# Altium PCB HomeGuard.PcbDoc
Units mm, origin at the board's own origin, x right, y up, seen from the top; angles counter-clockwise.
Board outline 50.25 x 50.25 mm, 2 copper layers (Top Layer, Bottom Layer); 19 components, 10 nets, 72 pads, 0 vias.
Unrouted connection lines stored in the file: 3.
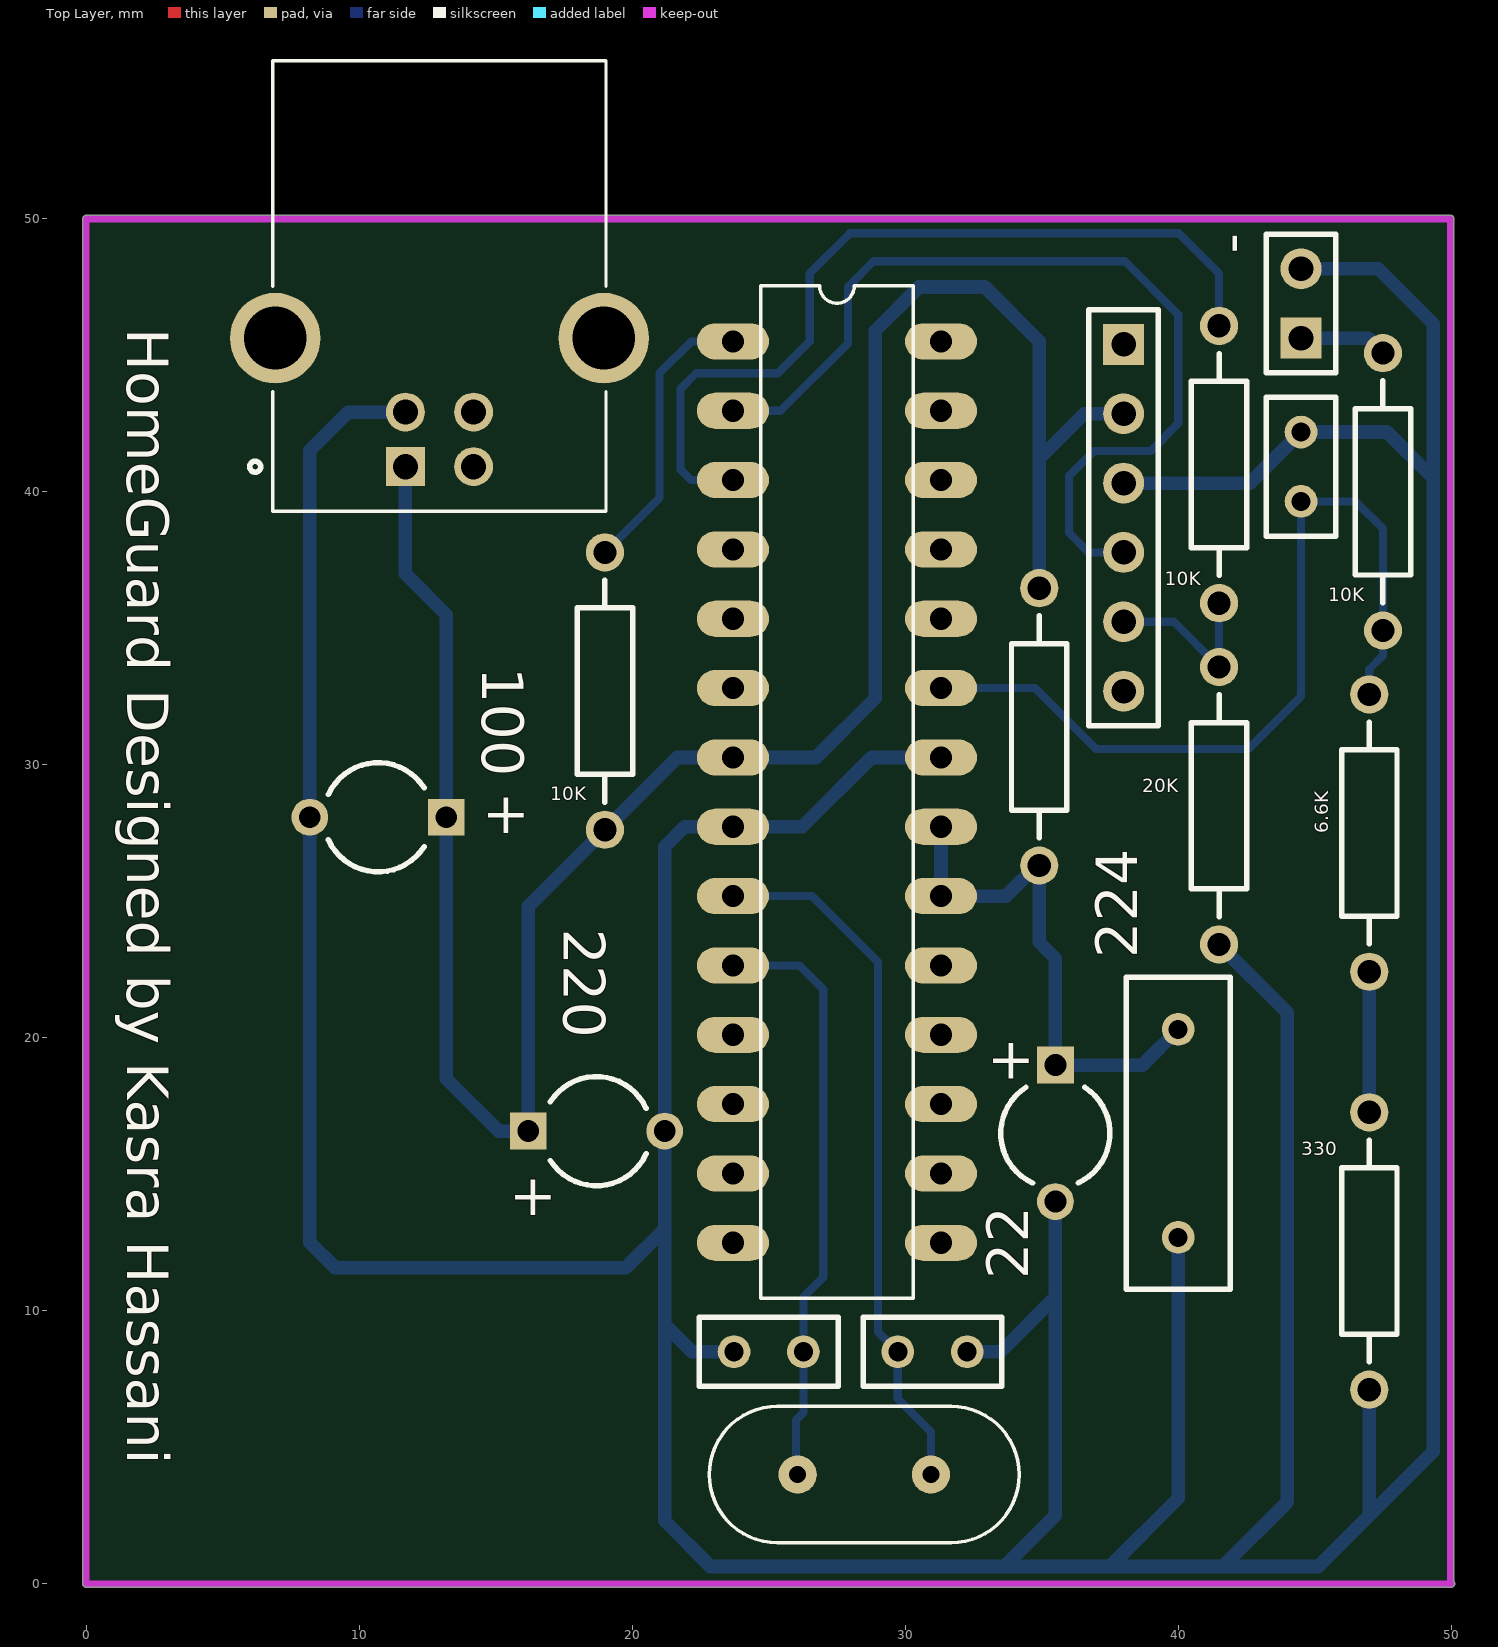
[diagram p0: Top Layer view]
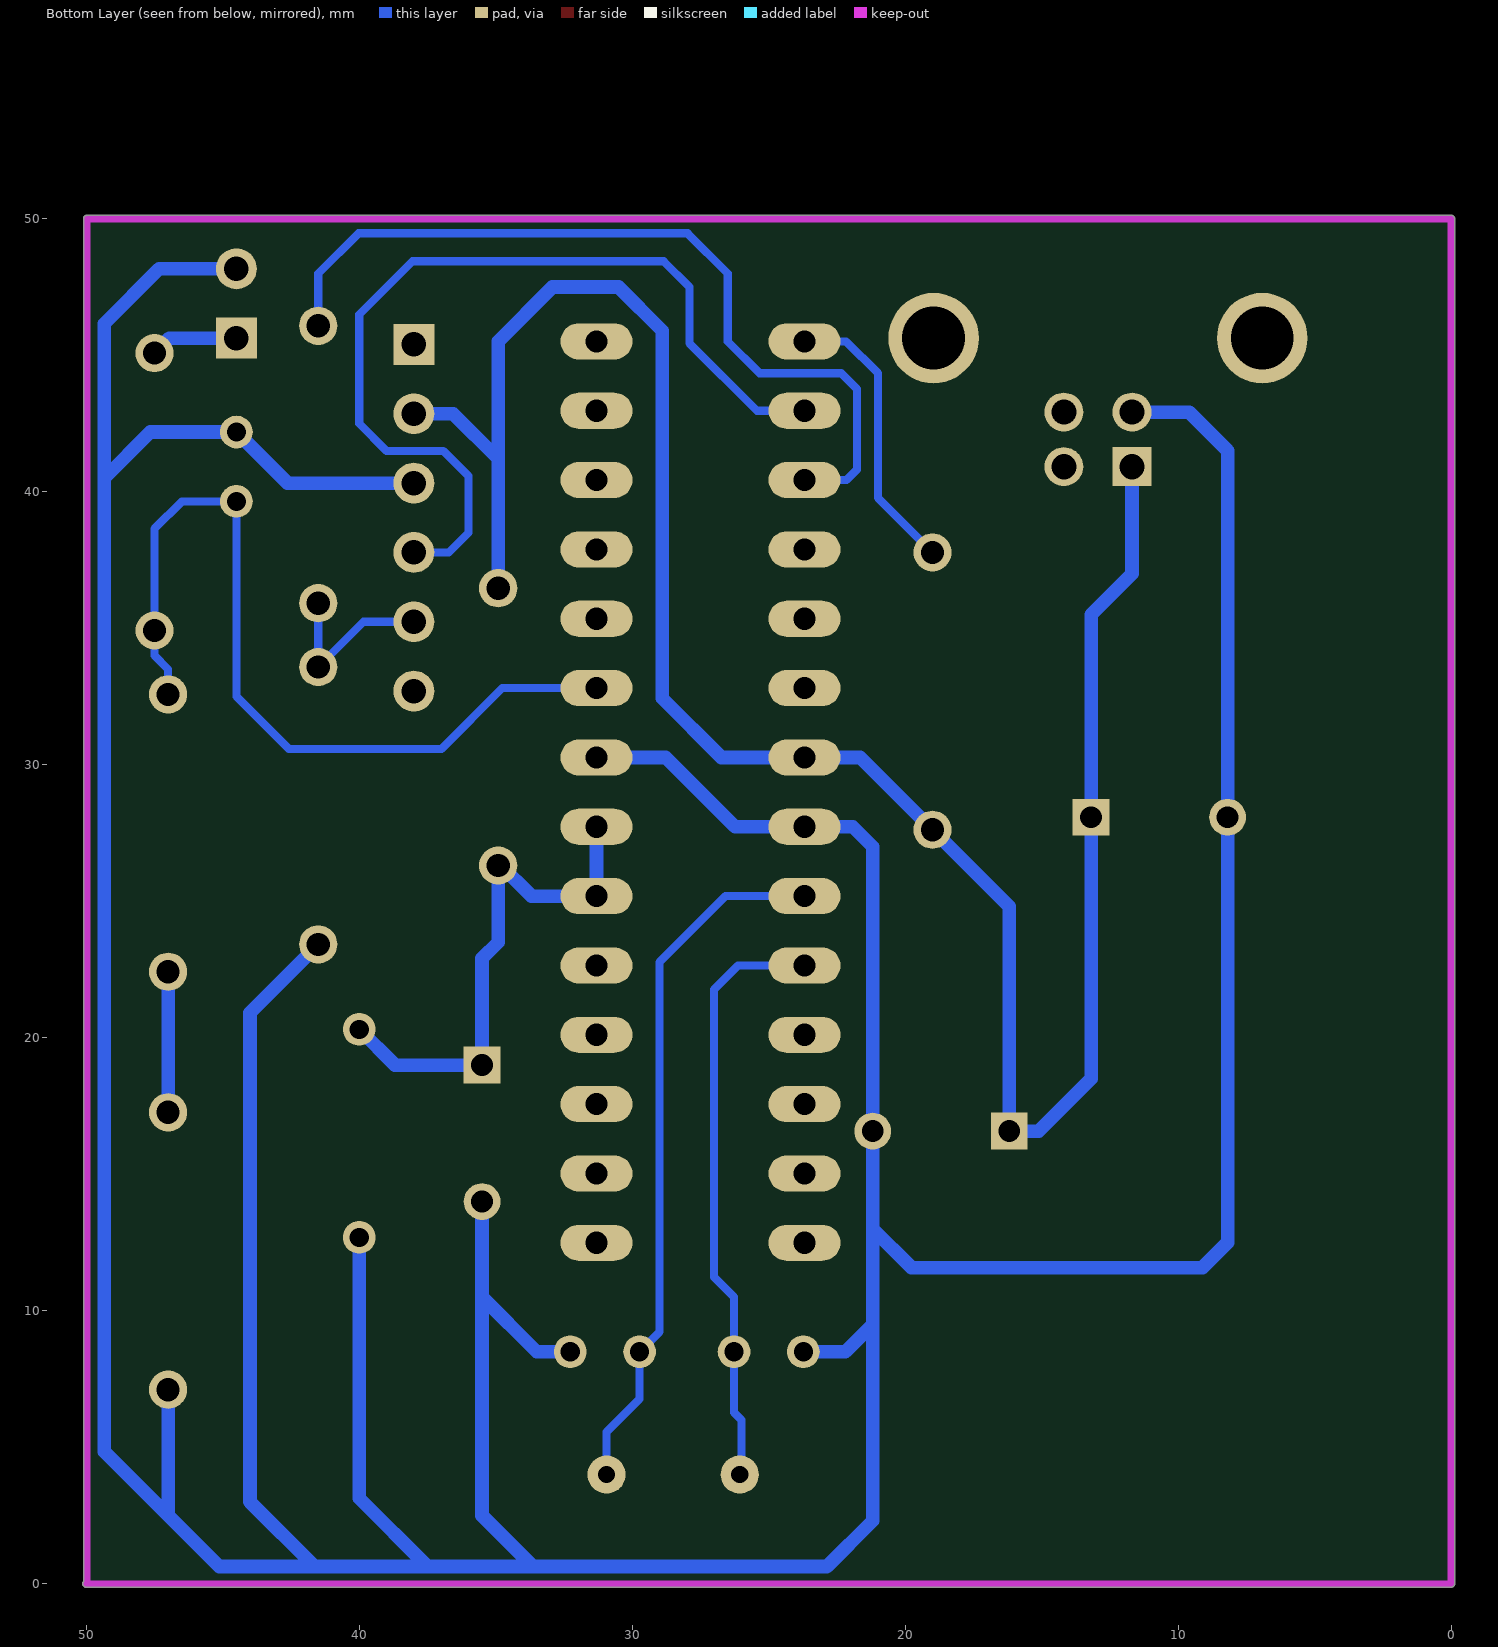
[diagram p1: Bottom Layer view, seen from below]

## Layer stack, top to bottom
Top Solder: solder mask 0.0102, Solder Resist, Dk 3.5
Top Layer: signal copper 0.0356
Dielectric 1: dielectric 0.32, FR-4, Dk 4.8
Bottom Layer: signal copper 0.0356
Bottom Solder: solder mask 0.0102, Solder Resist, Dk 3.5

## Board outline
-0.127,0 ccw(c0,0) 0,-0.127 50,-0.127 ccw(c50,0) 50.127,0 ccw(c50,0) 50.1,0.078 50.1,50 ccw(c49.973,50) 49.973,50.127 0,50.127 ccw(c0,50) -0.127,50

## Design rules (kind name [scope] priority, off if disabled: settings)
Clearance [All] p1: gap=0.254
PolygonConnect [All] p1: connectstyle=Relief reliefconductorwidth=0.254 reliefentries=4 polygonreliefangle="90 Angle" airgapwidth=0.254
RoutingVias [All] p1: holewidth=0.711 width=1.27 viastyle="Through Hole" minholewidth=0.711 minwidth=1.27 maxholewidth=0.711 maxwidth=1.27
SolderMaskExpansion [All] p1: expansion=0.102
Width [All] p1: maxlimit=0.5 minlimit=0.254 preferedwidth=0.3 toplayer_maxwidth=0.254 toplayer_prefwidth=0.254 bottomlayer_minwidth=0.3 minimp=50.000000 maximp=50.000000 favimp=50.000000 checkconnectedcopper=TRUE
30 further rules are at their usual default settings.

## Components (designator, comment, footprint, x,y, rotation, side; value= is the part's Value field where it differs from the comment)
6.6K "Comment" AXIAL-0.4 47,27.5 r90 top
10K "Comment" AXIAL-0.4 41.5,41 r90 top
10K "Comment" AXIAL-0.4 47.5,40 r90 top
10K "Comment" AXIAL-0.4 19,32.7 r90 top
20K "Comment" AXIAL-0.4 41.5,28.5 r90 top
22 "Comment" CAPR5-4X5 35.5,16.5 r270 top
100 "Comment" CAPR5-4X5 10.69,28.08 r180 top
220 "Comment" CAPR5-4X5 18.69,16.58 r0 top
224 "Comment" RAD-0.3 40,16.5 r90 top
330 "Comment" AXIAL-0.4 47,12.19 r90 top
- "Comment" HDR1X2 44.5,45.63 r90 top
? "Comment" AXIAL-0.4 34.91,31.39 r90 top
? "Comment" XTAL_ECS-160-20-4VX 28.5,4 r0 top
? "Comment" DIL28 27.5,29 r0 top
? "Comment" CUI_UJ2-BH-4-TH 11.69,40.92 r180 top
? "Comment" HDR1X6 38,45.4 r270 top
? "Comment" RAD-0.1 25,8.5 r180 top
? "Comment" RAD-0.1 31,8.5 r180 top
? "Comment" RAD-0.1 44.5,40.92 r90 top

## Footprints (in the part's own frame and the unit in brackets; to place one, negate y for a bottom-side part, rotate by r counter-clockwise, add the part's x,y. Pads: shape width x height; smd on the part's side, far side on the other; paste and mask are expansions set on the pad)
AXIAL-0.4 [mm] "Axial Device, Thru-Hole; 2 Leads; 0.4 in Pin Spacing"
  round 1.4 hole 0.85: 1(-5.08,0) 2(5.08,0)
  silkscreen extent -4.06,-1.02 4.06,1.02
CAPR5-4X5 [mm] "Capacitor; 2 Leads"
  rect 1.35x1.35 hole 0.8: 1(-2.5,0)
  round 1.35 hole 0.8: 2(2.5,0)
  silkscreen extent -1.69,-2 1.82,2
CUI_UJ2-BH-4-TH [mm]
  rect 1.428x1.428 hole 0.92: 1(0,0)
  round 1.428 hole 0.92: 2(-2.5,0) 3(-2.5,-2) 4(0,-2)
  round 3.316 hole 2.3: SH1(-7.27,-4.71) SH2(4.77,-4.71)
  silkscreen extent -7.35,-14.87 5.7,1.63
DIL28 [mil]
  oval 104x52 hole 32: 1(-150,650) 2(-150,550) 3(-150,450) 4(-150,350) 5(-150,250) 6(-150,150) 7(-150,50) 8(-150,-50) 9(-150,-150) 10(-150,-250) 11(-150,-350) 12(-150,-450) 13(-150,-550) 14(-150,-650) 15(150,-650) 16(150,-550) 17(150,-450) 18(150,-350) 19(150,-250) 20(150,-150) 21(150,-50) 22(150,50) 23(150,150) 24(150,250) 25(150,350) 26(150,450) 27(150,550) 28(150,650)
  silkscreen extent -110,-730 110,730
HDR1X2 [mm] "Connector; Header; 2 Position"
  rect 1.5x1.5 hole 0.9: 1(0,0)
  round 1.5 hole 0.9: 2(2.54,0)
  silkscreen extent -1.27,-1.27 3.81,1.27
HDR1X6 [mm] "Connector; Header; 6 Position"
  rect 1.5x1.5 hole 0.9: 1(0,0)
  round 1.5 hole 0.9: 2(2.54,0) 3(5.08,0) 4(7.62,0) 5(10.16,0) 6(12.7,0)
  silkscreen extent -1.27,-1.27 13.97,1.27
RAD-0.1 [mm] "Radial Cap, Thru-Hole; 2 Leads; 0.1 in Pin Spacing"
  round 1.2 hole 0.7: 1(-1.27,0) 2(1.27,0)
  silkscreen extent -2.54,-1.27 2.54,1.27
RAD-0.3 [mm] "Radial Cap, Thru-Hole; 2 Leads; 0.3 in Pin Spacing"
  round 1.2 hole 0.7: 1(-3.81,0)
  round 1.2 hole 0.7 paste+0: 2(3.81,0)
  silkscreen extent -5.71,-1.91 5.71,1.91
XTAL_ECS-160-20-4VX [mm]
  round 1.4 hole 0.63: 1(-2.44,0) 2(2.44,0)
  silkscreen extent -5.68,-2.5 5.68,2.5

## Part data
6.6K 10K 10K 10K 20K 330 ?: library part Res2
22 100 220: library part Cap2
224: library part Cap
-: library part "Header 2"
?: library part ECS-160-20-4VX
?: library part ATMEGA328-PU
?: library part UJ2-BH-4-TH
?: library part "Header 6"

## Nets (pads, with @x,y where several pads share a name; then routed paths per layer and width w, separated by ;. In a path a pad name is that pad's centre, name@x,y a point inside that pad or via, vN(x,y) a via of type N, cw(c..) or ccw(c..) an arc to the next point about the centre after c; other vN are vias at no path point)
ADC: 6.6K.2 10K.1@47.5,34.92 ?.1@44.5,39.65 ?.23 | length 31.8
  Bottom Layer w0.3: ?.23 34.76,32.81 36.99,30.58 42.58,30.58 44.5,32.5 44.5,39.65 46.5,39.65 47.5,38.65 47.5,34.92 47.5,34 47,33.5 6.6K.2
GND: 6.6K.1 20K.1 22.2 100.2 220.2 224.1 330.1 330.2 -.2 ?.1@32.27,8.5 ?.2@23.73,8.5 ?.2@44.5,42.19 ?.3@38,40.32 ?.4@11.69,42.92 ?.8 ?.22 | length 242.4
  Bottom Layer w0.5: ?.4@11.69,42.92 9.6,42.92 8.19,41.51 100.2 8.19,12.5 9.11,11.58 19.77,11.58 21.19,13 ; 21.19,9.5 22.19,8.5 ?.2@23.73,8.5 ; ?.22 28.77,30.27 26.23,27.73 ?.8 21.92,27.73 21.19,27 220.2 21.19,2.31 22.869,0.631 37.5,0.631 ; ?.1@32.27,8.5 33.5,8.5 35.5,10.5 ; 33.631,0.631 35.5,2.5 35.5,10.5 ; 22.2 35.5,10.5 ; ?.3@38,40.32 42.63,40.32 44.5,42.19 47.652,42.19 49.342,40.5 ; 224.1 40,3.131 37.5,0.631 ; 20K.1 44,20.92 44,3 41.631,0.631 ; -.2 47.33,48.17 49.342,46.158 49.342,40.5 ; 47,2.5 330.1 ; 330.2 6.6K.1 ; 37.5,0.631 41.631,0.631 ; 41.631,0.631 45.131,0.631 49.342,4.842 49.342,40.5
Reset: 10K.2@19,37.78 ?.1@23.69,45.51 | length 10.6
  Bottom Layer w0.3: 10K.2@19,37.78 21,39.78 21,44.346 22.164,45.51 ?.1@23.69,45.51
RX: 10K.1@41.5,35.92 10K.2@41.5,46.08 20K.2 ?.3@23.69,40.43 ?.5@38,35.24 | length 37.6
  Bottom Layer w0.3: ?.3@23.69,40.43 22.15,40.43 21.77,40.81 21.77,43.77 22.346,44.346 25.336,44.346 26.5,45.51 26.5,48 27.969,49.469 40.031,49.469 41.5,48 10K.2@41.5,46.08 ; ?.5@38,35.24 39.84,35.24 20K.2 10K.1@41.5,35.92
TX: ?.2@23.69,42.97 ?.4@38,37.78 | length 32.9
  Bottom Layer w0.3: ?.2@24.59,42.82 24.74,42.97 25.43,42.97 27.9,45.44 27.9,47.5 28.846,48.446 38.054,48.446 40,46.5 40,42.5 39,41.5 36.92,41.5 36,40.58 36,38.5 36.72,37.78 ?.4@38,37.78
V5: 10K.1@19,27.62 22.1 100.1 220.1 224.2 ?.1@11.69,40.92 ?.1@34.91,26.31 ?.2@34.91,36.47 ?.2@38,42.86 ?.7 ?.20 ?.21 | length 103.9
  Bottom Layer w0.5: ?.1@11.69,40.92 11.69,37 13.19,35.5 100.1 13.19,18.5 15.11,16.58 220.1 16.19,24.81 19,27.62 21.65,30.27 ?.7 26.73,30.27 28.9,32.44 28.9,45.9 30.5,47.5 32.92,47.5 34.91,45.51 34.91,41.21 ; ?.21 ?.20 33.69,25.19 ?.1@34.86,26.36 ; ?.1@34.91,26.31 34.91,23.5 35.5,22.91 22.1 38.69,19 224.2 ; ?.2@34.91,36.47 34.91,41.21 ; ?.2@38,42.86 36.56,42.86 34.91,41.21
V12: 10K.2@47.5,45.08 -.1 | length 3.2
  Bottom Layer w0.5: -.1 46.95,45.63 10K.2@47.5,45.08
VCC: 
XTAL1: ?.2@29.73,8.5 ?.2@30.94,4 ?.9 | length 25.9
  Bottom Layer w0.3: ?.9 26.58,25.19 29,22.77 29,9.23 29.73,8.5 29.73,6.77 30.94,5.56 ?.2@30.94,4
XTAL2: ?.1@26.06,4 ?.1@26.27,8.5 ?.10 | length 21
  Bottom Layer w0.3: ?.10@24.59,22.5 24.74,22.65 26.12,22.65 27,21.77 27,11.23 26.27,10.5 26.27,8.5 26.27,6.27 26,6 ?.1@26,4.06
pads on no net: ?.1@38,45.4 ?.2@14.19,40.92 ?.3@14.19,42.92 ?.4@23.69,37.89 ?.5@23.69,35.35 ?.6 ?.11 ?.12 ?.13 ?.14 ?.15 ?.16 ?.17 ?.18 ?.19 ?.24 ?.25 ?.26 ?.27 ?.28 ?.SH1 ?.SH2

## Keep-outs
Keep-Out Layer:
  lines w0.254: 49.973,0 49.973,50 0,50 0,0 50,0

## Silkscreen, mask and mechanical layers (free items; w line width, h text height)
Top Overlay:
  text "HomeGuard Designed by Kasra Hassani" at 1.5,46 h1.52 r270
  text "+" at 14.5,27.5 h1.52
  text "+" at 33,18.5 h1.52
  text "+" at 15.5,13.5 h1.52